# Altium PCB 菜单顶板.PcbDoc
Units mm, origin at the board's own origin, x right, y up, seen from the top; angles counter-clockwise.
Board outline 55.24 x 65.13 mm, 2 copper layers (Top Layer, Bottom Layer); 24 components, 18 nets, 78 pads, 8 vias.
Unrouted connection lines stored in the file: 18.
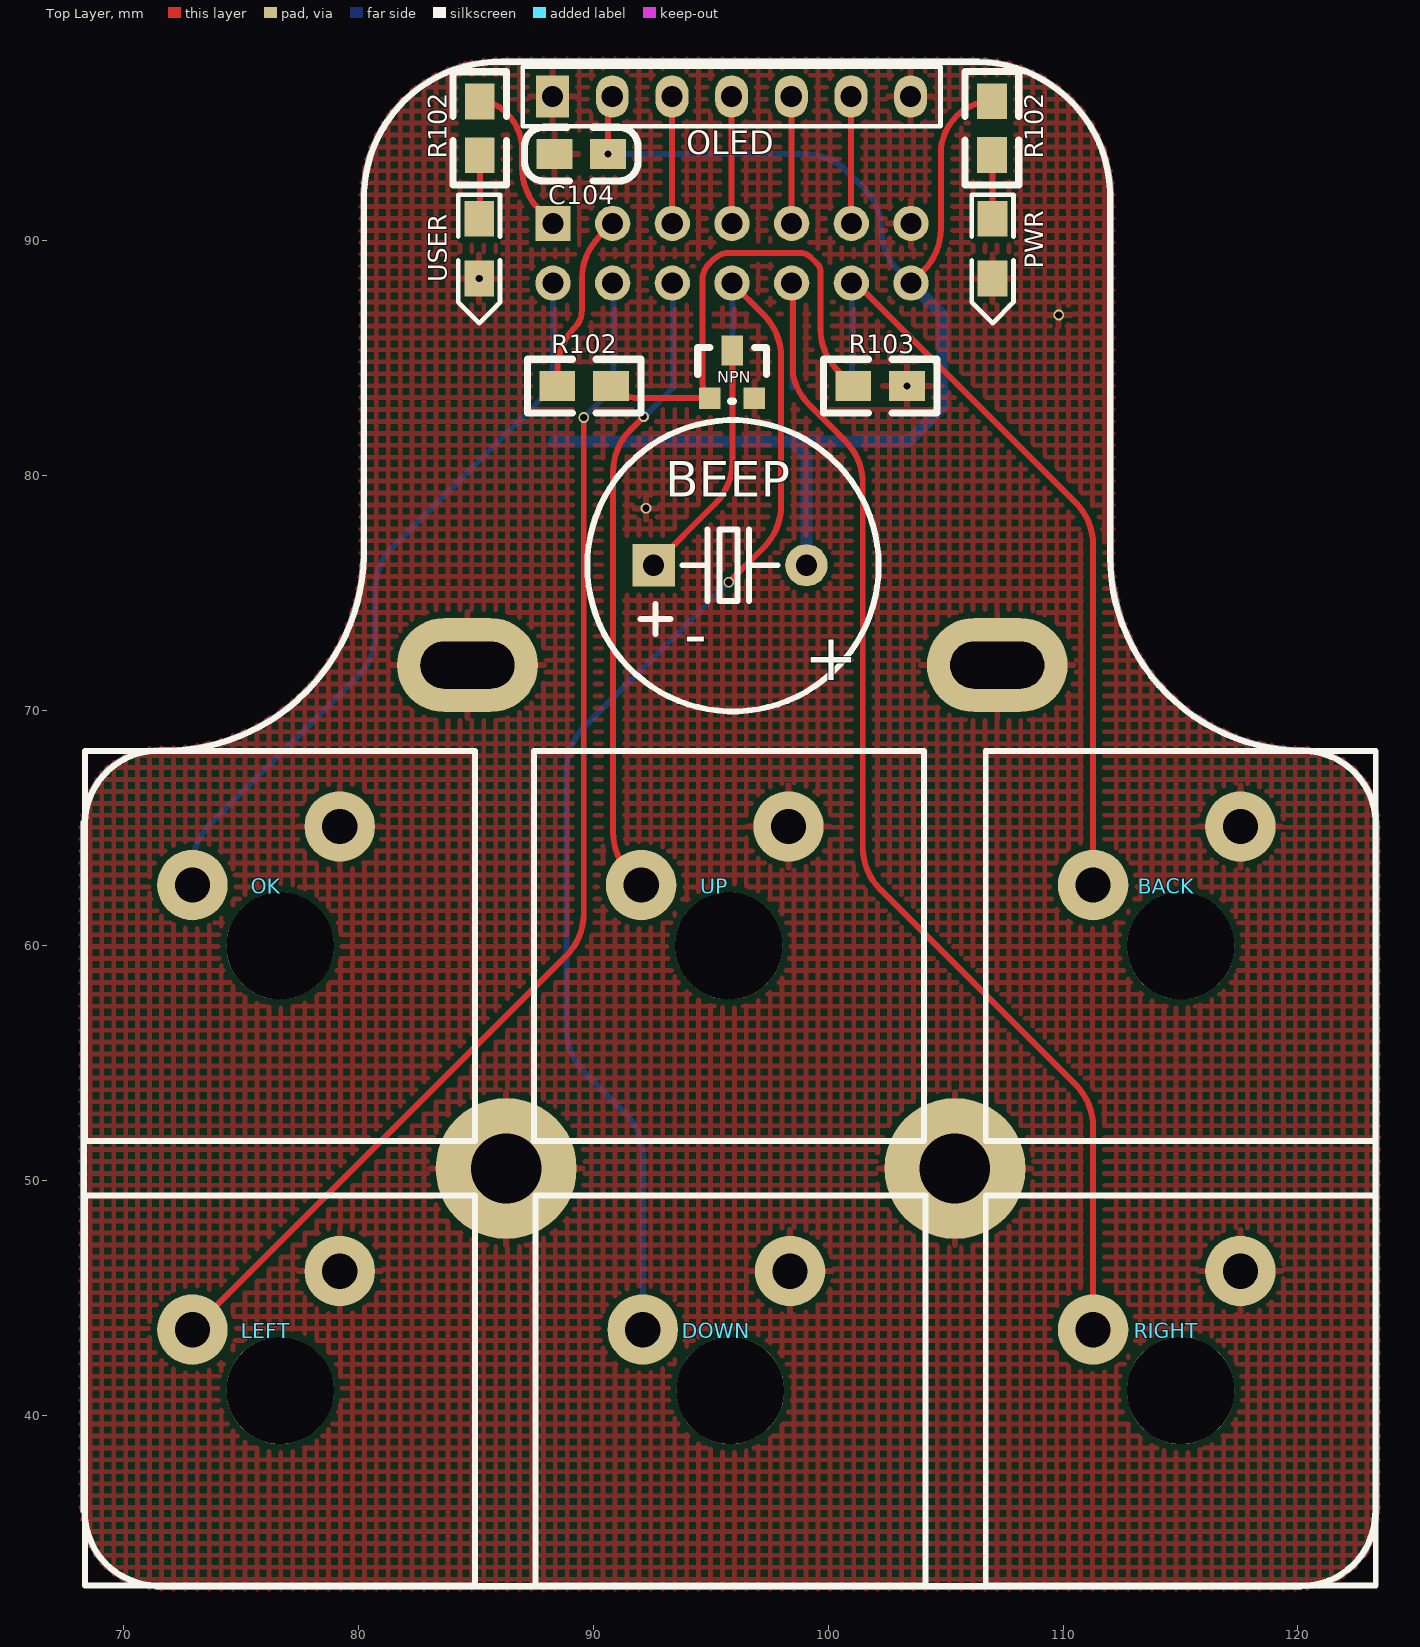
[diagram p0: Top Layer view]
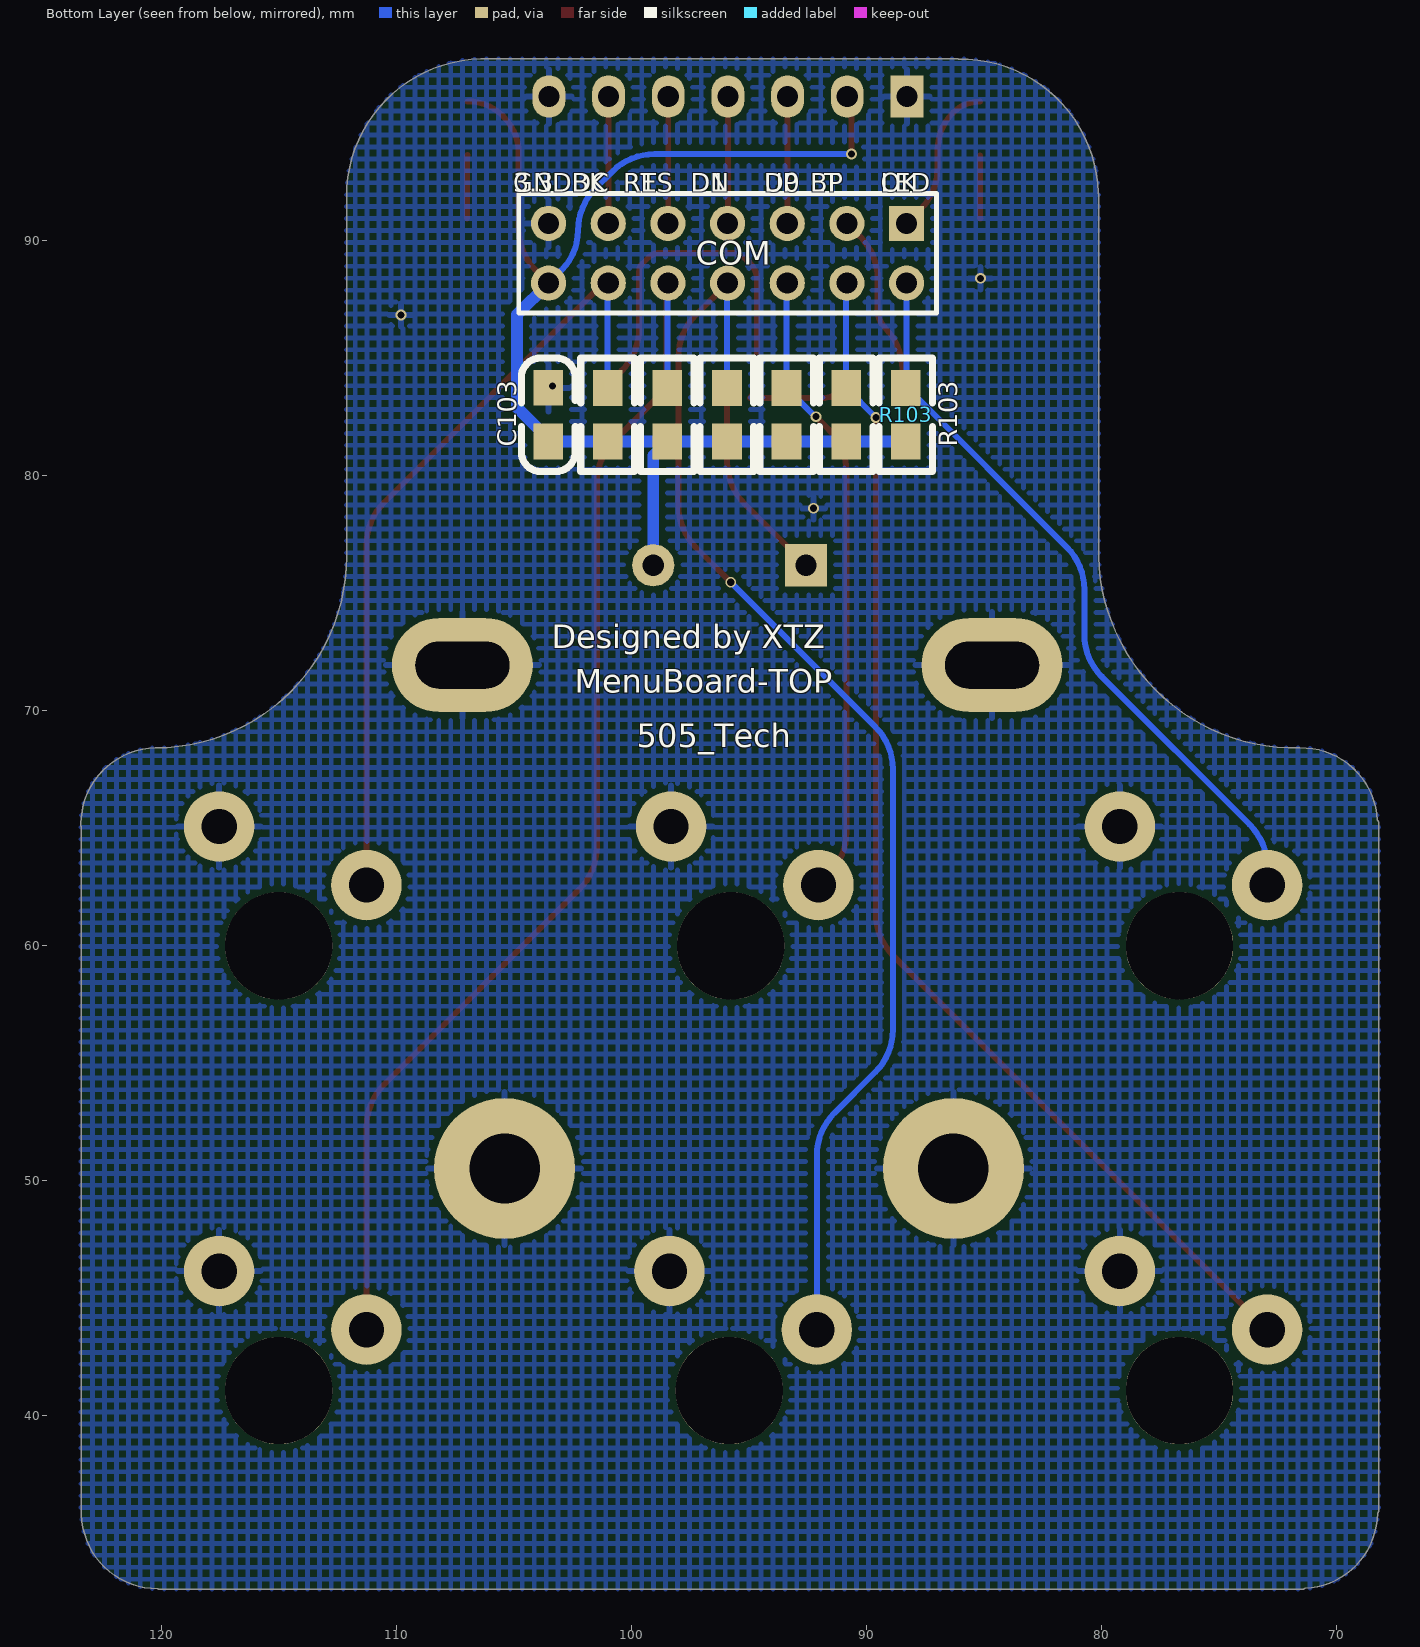
[diagram p1: Bottom Layer view, seen from below]

## Layer stack, top to bottom
Top Solder: solder mask 0.0102, Solder Resist, Dk 3.5
Top Layer: signal copper 0.0356
Dielectric 1: dielectric 0.32, FR-4, Dk 4.8
Bottom Layer: signal copper 0.0356
Bottom Solder: solder mask 0.0102, Solder Resist, Dk 3.5

## Board outline
68.247,35.824 cw(c68.325,35.925) 68.198,35.925 68.198,65.225 cw(c68.325,65.225) 68.251,65.329 cw(c71.487,65.162) 71.553,68.402 cw(c71.55,68.275) 71.553,68.402 ccw(c71.762,76.763) 80.123,76.552 ccw(c71.762,76.763) 80.123,76.553 80.123,76.55 80.123,91.981 cw(c80.25,91.981) 80.13,92.024 cw(c86,91.85) 86.094,97.722 cw(c86.131,97.6) 86.131,97.727 106.405,97.727 cw(c106.406,97.6) 106.409,97.727 cw(c106.275,91.875) 112.129,91.875 cw(c106.275,91.875) 112.127,91.742 cw(c106.275,91.875) 112.127,91.741 112.127,91.744 112.127,76.55 cw(c112,76.55) 112.127,76.549 ccw(c120.266,76.541) 120.257,68.402 cw(c120.257,68.275) 120.26,68.402 ccw(c120.194,65.163) 120.259,68.402 120.26,68.402 cw(c120.194,65.163) 123.435,65.163 cw(c120.194,65.163) 123.434,65.097 cw(c123.307,65.1) 123.427,65.059 123.427,35.825 cw(c123.3,35.825) 123.41,35.761 cw(c120.171,35.856) 120.173,32.615 cw(c120.108,32.725) 120.108,32.598 71.425,32.598 cw(c71.425,32.725) 71.346,32.625 cw(c71.488,35.862)

## Design rules (kind name [scope] priority, off if disabled: settings)
Clearance [All] p1: gap=0.254 ignorepadtopadclearanceinfootprint=FALSE except(0: Arc-Hole Track-Hole SMDPad-Hole THPad-Hole Via-Hole Fill-Hole Poly-Hole Region-Hole Text-Hole)
PolygonConnect [All] p1: connectstyle=Relief reliefconductorwidth=0.254 reliefentries=4 polygonreliefangle="90 Angle" airgapwidth=0.254
RoutingVias [All] p1: holewidth=0.711 width=1.27 viastyle="Through Hole" minholewidth=0.711 minwidth=1.27 maxholewidth=0.711 maxwidth=1.27
SolderMaskExpansion [All] p1: expansion=0.102
Width [All] p1: maxlimit=0.508 minlimit=0.127 preferedwidth=0.254
30 further rules are at their usual default settings.

## Classes and differential pairs
component class 菜单顶板: BACK BEEP C103 C104 COM DOWN LEFT NPN OK OLED PWR R1 R102 R103 RIGHT UP

## Components (designator, comment, footprint, x,y, rotation, side; value= is the part's Value field where it differs from the comment)
BACK "KEY" anjian 115.01,59.975 r0 top locked
BEEP "BEEP" "BEEP 6.5x12x6" 92.575,76.175 r0 top
C103 "104" 0805C 103.55,81.46 r90 bottom (schematic designator C1)
C104 "104" 0805C 90.618,93.665 r180 top (schematic designator C2)
COM "Pin HDR2X7" "Pin HDR2X7/2.54mm-S" 88.29,90.725 r0 bottom
DOWN "KEY" anjian 95.843,41.05 r0 top locked
LEFT "KEY" anjian 76.675,41.05 r0 top locked
NPN "NPN" SOT-23 95.85,84.175 r0 top
OK "KEY" anjian 76.675,59.975 r0 top locked
OLED "SPI OLED" OLED12864 95.895,96.125 r0 top locked
PWR "LED" LED-0805B 107,90.925 r270 top (schematic designator 3V3PWR)
R5 "10K" 0805R 93.4,81.439 r90 bottom
R7 "10K" 0805R 90.863,81.439 r90 bottom
R8 "10K" 0805R 95.938,81.439 r90 bottom
R9 "10K" 0805R 98.476,81.439 r90 bottom
R102 "1K" 0805R 88.475,83.8 r0 top (schematic designator R1)
R102 "1K" 0805R 85.175,95.911 r270 top (schematic designator R3)
R102 "1K" 0805R 106.975,95.921 r270 top (schematic designator R2)
R103 "10K" 0805R 103.361,83.8 r180 top (schematic designator R10)
R103 "10K" 0805R 101.013,81.439 r90 bottom (schematic designator R6)
R103 "10K" 0805R 88.325,81.439 r90 bottom (schematic designator R4)
RIGHT "KEY" anjian 115.01,41.05 r0 top locked
UP "KEY" anjian 95.775,59.975 r0 top locked
USER "LED" LED-0805B 85.15,90.926 r270 top (schematic designator 5VPWR)

## Footprints (in the part's own frame and the unit in brackets; to place one, negate y for a bottom-side part, rotate by r counter-clockwise, add the part's x,y. Pads: shape width x height; smd on the part's side, far side on the other; paste and mask are expansions set on the pad)
0805C [mil]
  rect 60x50 smd: 1(-0.71,-0.4) 2(89.29,-0.4)
  silkscreen extent -51,-45 139,45, body extent 6,-25 84,25, height 31
0805R [mil]
  rect 60x50 smd: 1(0,0) 2(90,0)
  silkscreen extent -50,-45 140,45, body extent 1,-25 80,25, height 15
anjian [mm]
  round 4.572 hole 4.572: 0(0,0)
  round 3 hole 1.5: 1(-3.73,2.59) 2(2.54,5.08)
  silkscreen extent -8.3,-8.3 8.3,8.3
"BEEP 6.5x12x6" [mm]
  rect 1.8x1.8 hole 0.9: 1(0,0)
  round 1.8 hole 0.9: 2(6.5,0)
  silkscreen extent -2.82,-6.22 9.58,6.17, body extent -2.7,-5.97 9.3,6.03, height 6.05
LED-0805B [mil]
  rect 60x50 smd: A(0,0) K(100,0)
  silkscreen extent -40,-35 175,35, body extent 10,-25 89,25, height 32
OLED12864 [mm]
  rect 1.4x1.8 hole 0.9: 1(-7.62,0)
  oval 1.4x1.8 hole 0.9: 2(-5.08,0) 3(-2.54,0) 4(0,0) 5(2.54,0) 6(5.08,0) 7(7.62,0)
  silkscreen extent -8.89,-1.27 8.89,1.27, body extent -14.5,-26.31 14.5,2.19, height 9.9
"Pin HDR2X7/2.54mm-S" [mm] "Connector; Header; 7x2 Position"
  rect 1.5x1.5 hole 0.9: 1(0,0)
  round 1.5 hole 0.9: 2(0,2.54) 3(2.54,0) 4(2.54,2.54) 5(5.08,0) 6(5.08,2.54) 7(7.62,0) 8(7.62,2.54) 9(10.16,0) 10(10.16,2.54) 11(12.7,0) 12(12.7,2.54) 13(15.24,0) 14(15.24,2.54)
  silkscreen extent -1.27,-1.27 16.51,3.81, body extent -1.27,-1.27 16.51,3.81, height 7.58
SOT-23 [mil]
  rect 36x36 smd: B(-35,-35) E(40,-35)
  rect 36x50 smd: C(3,45)
  silkscreen extent -55,-40 60,50, body extent -54,-48 60,62, height 47

## Part data
BEEP: "蜂鸣器"
C103 C104: library part CAP
NPN: "NPN三极管"
R5 R7 R8 R9 R102 R102 R102 R103 R103 R103: library part RES

## Free pads (board coordinates)
  round 6 hole 3: 2(86.3,50.5) 2(105.4,50.5)
  round 6 on Bottom Solder: 4(119.898,36.127) 6(71.523,36.127)
  oval 6x4 hole 2 slot 4 at 0 deg: 7(84.65,71.925) 7(107.2,71.925)

## Via types
v1: diameter 0.457, hole 0.305, Top Layer to Bottom Layer, 8 vias

## Nets (pads, with @x,y where several pads share a name; then routed paths per layer and width w, separated by ;. In a path a pad name is that pad's centre, name@x,y a point inside that pad or via, vN(x,y) a via of type N, cw(c..) or ccw(c..) an arc to the next point about the centre after c; other vN are vias at no path point)
3.3V: BEEP.2 C103.1 C104.1 COM.14 OLED.2 R5.1 R7.1 R8.1 R9.1 R102.1@106.975,95.921 R103.1@88.325,81.439 R103.1@101.013,81.439 | length 56.4
  Top Layer w0.254: v1(90.636,93.675) 90.636,95.693 cw(c91.247,95.693) OLED.2 ; COM.14 104.056,88.711 ccw(c102.26,90.507) 104.8,90.507 104.8,93.706 cw(c107.019,93.706) 105.45,95.275 105.474,95.299 cw(c106.975,93.799) R102.1@106.975,95.921
  Bottom Layer w0.254: v1(90.636,93.675) 99.023,93.675 cw(c99.023,91.135) 100.819,92.931 101.531,92.219 cw(c99.735,90.423) 102.275,90.423 ccw(c104.648,90.423) 102.97,88.745 COM.14
  Bottom Layer w0.508: R103.1@88.325,81.439 R7.1 R5.1 R8.1 R9.1 ; BEEP.2 99.075,80.84 R9.1 ; COM.14 104.875,86.84 104.875,82.9 103.414,81.439 101.013,81.439 R9.1
BACK: BACK.1 COM.12 R103.2@101.013,83.725 | length 34.8
  Top Layer w0.254: COM.12 cw(c100.99,87.702) 101.331,88.044 110.536,78.839 cw(c108.74,77.043) 111.28,77.043 BACK.1
  Bottom Layer w0.254: COM.12@100.99,87.69 COM.12 101.013,88.162 R103.2@101.013,83.725
BEEP: COM.3 R102.1@88.475,83.8 | length 8.1
  Top Layer w0.254: R102.1@88.781,84.106 88.475,83.8 88.475,84.498 cw(c91.015,84.498) 89.219,86.294 ccw(c88.48,87.033) 89.525,87.033 89.525,88.368 cw(c92.065,88.368) 90.269,90.164 COM.3
DOWN: COM.8 DOWN.1 R8.2 | length 54.5
  Top Layer w0.254: v1(95.775,75.45) 97.256,76.931 ccw(c95.46,78.727) 98,78.727 98,85.043 ccw(c95.46,85.043) 97.256,86.839 COM.8
  Bottom Layer w0.254: DOWN.1 92.113,51.06 ccw(c89.573,51.06) 91.369,52.856 89.619,54.606 cw(c91.415,56.402) 88.875,56.402 88.875,67.498 cw(c91.415,67.498) 89.619,69.294 v1(95.775,75.45) ; COM.8 95.938,88.157 R8.2
GND: BACK.2 C103.2 C104.2 COM.13 DOWN.2 LEFT.2 NPN.E OK.2 OLED.1 OLED.7 pad.2 pad.7 PWR.K R103.1@103.361,83.8 RIGHT.2 UP.2 USER.K
  other v1: 92.25,78.6 103.361,83.8 109.815,86.825 85.15,88.386
LED: COM.1 R102.1@85.175,95.911 | length 6.8
  Top Layer w0.254: R102.1@85.175,95.911 cw(c85.175,94.308) 86.309,95.441 86.325,95.425 cw(c84.756,93.856) 86.975,93.856 86.975,93.092 ccw(c89.515,93.092) 87.719,91.296 COM.1
  Top Layer w0.508: COM.1@88.075,90.725 COM.1
LEFT: COM.4 LEFT.1 R7.2 | length 52.4
  Top Layer w0.254: LEFT.1 88.856,59.551 ccw(c87.06,61.347) 89.6,61.347 v1(89.6,82.465) ; COM.4@90.83,87.707 COM.4
  Bottom Layer w0.254: v1(89.6,82.465) v1(89.6,82.465) R7.2 90.863,88.152 COM.4
Net3V3PWR_A: PWR.A R102.2@106.975,93.635 | length 2.7
  Top Layer w0.254: R102.2@106.975,93.635 cw(c106.915,93.575) 107,93.575 PWR.A
Net5VPWR_A: R102.2@85.175,93.625 USER.A | length 2.7
  Top Layer w0.254: USER.A ccw(c85.09,90.986) 85.175,90.986 R102.2@85.175,93.625
NetBEEP_1: BEEP.1 NPN.C | length 10.4
  Top Layer w0.254: BEEP.1 95.182,78.782 ccw(c93.386,80.578) 95.926,80.578 NPN.C
NetCOM_5: COM.5 OLED.3 | length 5.4
  Top Layer w0.254: OLED.3 93.355,90.761 ccw(c93.406,90.761) COM.5
NetCOM_7: COM.7 OLED.4 | length 5.4
  Top Layer w0.254: OLED.4 95.895,90.761 ccw(c95.946,90.761) COM.7
NetCOM_9: COM.9 OLED.5 | length 5.4
  Top Layer w0.254: OLED.5 98.435,90.761 ccw(c98.486,90.761) COM.9
NetCOM_11: COM.11 OLED.6 | length 5.4
  Top Layer w0.254: OLED.6 100.975,90.761 ccw(c101.026,90.761) COM.11
NetNPN_B: NPN.B R102.2@90.761,83.8 R103.2@101.075,83.8 | length 20.9
  Top Layer w0.254: R102.2@90.761,83.8 ccw(c92.002,85.041) 92.002,83.286 NPN.B cw(c95.712,84.037) 94.65,84.037 94.65,88.301 cw(c95.674,88.301) 94.95,89.025 95.099,89.174 cw(c95.825,88.449) 95.825,89.475 98.792,89.475 cw(c98.792,88.792) 99.275,89.275 99.534,89.016 cw(c99.192,88.675) 99.675,88.675 99.675,86.252 ccw(c102.215,86.252) 100.419,84.456 R103.2@101.075,83.8
OK: COM.2 OK.1 R103.2@88.325,83.725 | length 31.6
  Bottom Layer w0.254: OK.1 72.945,63.343 cw(c75.485,63.343) 73.689,65.139 79.981,71.431 ccw(c78.185,73.227) 80.725,73.227 80.725,75.143 cw(c83.265,75.143) 81.469,76.939 88.29,83.76 COM.2
RIGHT: COM.10 R9.2 RIGHT.1 | length 53.9
  Top Layer w0.254: COM.10 cw(c98.31,88.045) 98.508,88.045 98.508,84.262 ccw(c100.99,84.802) 99.194,83.006 100.731,81.469 cw(c98.935,79.673) 101.475,79.673 101.475,64.177 ccw(c104.015,64.177) 102.219,62.381 110.536,54.064 cw(c108.74,52.268) 111.28,52.268 RIGHT.1
  Bottom Layer w0.254: COM.10 98.476,88.159 R9.2
UP: COM.6 R5.2 UP.1 | length 27
  Top Layer w0.254: UP.1 91.594,63.016 cw(c93.39,64.812) 90.85,64.812 90.85,80.148 cw(c93.39,80.148) 91.594,81.944 v1(92.15,82.5)
  Bottom Layer w0.254: v1(92.15,82.5) ccw(c92.15,82.561) 92.193,82.518 R5.2 93.4,88.155 COM.6
pads on no net: BACK.0 DOWN.0 LEFT.0 OK.0 RIGHT.0 UP.0

## Polygon pours and split planes (outlines as drawn)
GND on Bottom Layer "Top Layer-No Net1" (hatched 90Degree grid 0.508 track 0.203, pour order 27): 68.247,35.824 cw(c68.325,35.925) 68.198,35.925 68.198,65.225 cw(c68.325,65.225) 68.251,65.329 cw(c71.487,65.162) 71.553,68.402 cw(c71.55,68.275) 71.553,68.402 ccw(c71.762,76.763) 80.123,76.552 ccw(c71.761,76.769) 80.123,76.553 80.123,76.55 80.123,91.981 cw(c80.25,91.981) 80.13,92.024 cw(c86,91.85) 86.094,97.722 cw(c86.131,97.6) 86.131,97.727 106.405,97.727 cw(c106.406,97.6) 106.409,97.727 cw(c106.275,91.875) 112.129,91.875 cw(c106.275,91.875) 112.127,91.742 cw(c106.279,91.872) 112.127,91.741 112.127,91.744 112.127,76.55 cw(c112,76.55) 112.127,76.549 ccw(c120.266,76.541) 120.257,68.402 cw(c120.257,68.275) 120.26,68.402 ccw(c120.19,65.163) 120.259,68.402 120.26,68.402 cw(c120.194,65.163) 123.435,65.163 cw(c120.194,65.163) 123.434,65.097 cw(c123.307,65.1) 123.427,65.059 123.427,35.825 cw(c123.3,35.825) 123.41,35.761 cw(c120.171,35.856) 120.173,32.615 cw(c120.108,32.725) 120.108,32.598 71.425,32.598 cw(c71.425,32.725) 71.346,32.625 cw(c71.488,35.862)
no net on Bottom Layer "Bottom Layer-No Net" (hatched Horizontal grid 0.508 track 0.203, pour order 8): 71.225,39.3
GND on Top Layer "Top Layer-No Net" (hatched 90Degree grid 0.508 track 0.203, pour order 26): 68.247,35.824 cw(c68.325,35.925) 68.198,35.925 68.198,65.225 cw(c68.325,65.225) 68.251,65.329 cw(c71.487,65.162) 71.553,68.402 cw(c71.55,68.275) 71.553,68.402 ccw(c71.762,76.763) 80.123,76.552 ccw(c71.761,76.769) 80.123,76.553 80.123,76.55 80.123,91.981 cw(c80.25,91.981) 80.13,92.024 cw(c86,91.85) 86.094,97.722 cw(c86.131,97.6) 86.131,97.727 106.405,97.727 cw(c106.406,97.6) 106.409,97.727 cw(c106.275,91.875) 112.129,91.875 cw(c106.275,91.875) 112.127,91.742 cw(c106.279,91.872) 112.127,91.741 112.127,91.744 112.127,76.55 cw(c112,76.55) 112.127,76.549 ccw(c120.266,76.541) 120.257,68.402 cw(c120.257,68.275) 120.26,68.402 ccw(c120.19,65.163) 120.259,68.402 120.26,68.402 cw(c120.194,65.163) 123.435,65.163 cw(c120.194,65.163) 123.434,65.097 cw(c123.307,65.1) 123.427,65.059 123.427,35.825 cw(c123.3,35.825) 123.41,35.761 cw(c120.171,35.856) 120.173,32.615 cw(c120.108,32.725) 120.108,32.598 71.425,32.598 cw(c71.425,32.725) 71.346,32.625 cw(c71.488,35.862)
GND on Top Layer "GND_L01_P023" (hatched 90Degree grid 0.508 track 0.203, pour order 23): 68.247,35.824 cw(c68.325,35.925) 68.198,35.925 68.198,65.225 cw(c68.325,65.225) 68.251,65.329 cw(c71.487,65.162) 71.553,68.402 cw(c71.55,68.275) 71.553,68.402 ccw(c71.762,76.763) 80.123,76.552 ccw(c71.761,76.769) 80.123,76.553 80.123,76.55 80.123,91.981 cw(c80.25,91.981) 80.13,92.024 cw(c86,91.85) 86.094,97.722 cw(c86.131,97.6) 86.131,97.727 106.405,97.727 cw(c106.406,97.6) 106.409,97.727 cw(c106.275,91.875) 112.129,91.875 cw(c106.275,91.875) 112.127,91.742 cw(c106.279,91.872) 112.127,91.741 112.127,91.744 112.127,76.55 cw(c112,76.55) 112.127,76.549 ccw(c120.266,76.541) 120.257,68.402 cw(c120.257,68.275) 120.26,68.402 ccw(c120.19,65.163) 120.259,68.402 120.26,68.402 cw(c120.194,65.163) 123.435,65.163 cw(c120.194,65.163) 123.434,65.097 cw(c123.307,65.1) 123.427,65.059 123.427,35.825 cw(c123.3,35.825) 123.41,35.761 cw(c120.171,35.856) 120.173,32.615 cw(c120.108,32.725) 120.108,32.598 71.425,32.598 cw(c71.425,32.725) 71.346,32.625 cw(c71.488,35.862)

## Silkscreen, mask and mechanical layers (free items; w line width, h text height)
Top Overlay:
  lines w0.254: 68.325,35.925 68.325,65.225 ; 68.375,35.925 ccw(c71.488,35.862) 71.425,32.75 ; 68.375,65.225 cw(c71.487,65.162) 71.55,68.275 ccw(c71.762,76.763) 80.25,76.55 80.25,91.981 ; 71.425,32.725 120.108,32.725 ; 80.256,91.981 cw(c86,91.85) 86.131,97.594 ; 86.131,97.6 106.406,97.6 cw(c106.275,91.875) 112,91.744 112,76.55 ccw(c120.266,76.541) 120.257,68.275 cw(c120.194,65.163) 123.307,65.1 ; 120.108,32.743 ccw(c120.171,35.856) 123.283,35.793 ; 123.3,35.825 123.3,65.1
  text "-" at 94.862,72.275 h2
  text "+" at 101.275,71.275 h2
Bottom Overlay:
  text "OK" at 89.4,92.075 h0.8
  text "LED" at 89.4,92.075 h0.8
  text "BP" at 92.4,92.075 h0.8
  text "LT" at 92.4,92.075 h0.8
  text "D0" at 94.35,92.075 h0.8
  text "UP" at 94.35,92.075 h0.8
  text "D1" at 97.475,92.075 h0.8
  text "DN" at 97.475,92.075 h0.8
  text "RES" at 100.35,92.075 h0.8
  text "RT" at 100.35,92.075 h0.8
  text "DC" at 102.55,92.075 h0.8
  text "BK" at 102.55,92.075 h0.8
  text "3.3" at 105.025,92.075 h0.8
  text "GND" at 105.025,92.075 h0.8
  text "Designed by XTZ" at 103.4,72.65 h1
  text "MenuBoard-TOP" at 102.425,70.75 h1
  text "505_Tech" at 99.775,68.425 h1

## Dimensions
68.325,65.225 to 123.3,65.1 on Top Solder
106.406,97.6 to 120.108,32.725 on Top Solder